# EAGLE board STM32F050F Base_Routed (EAGLE 6.5.0)
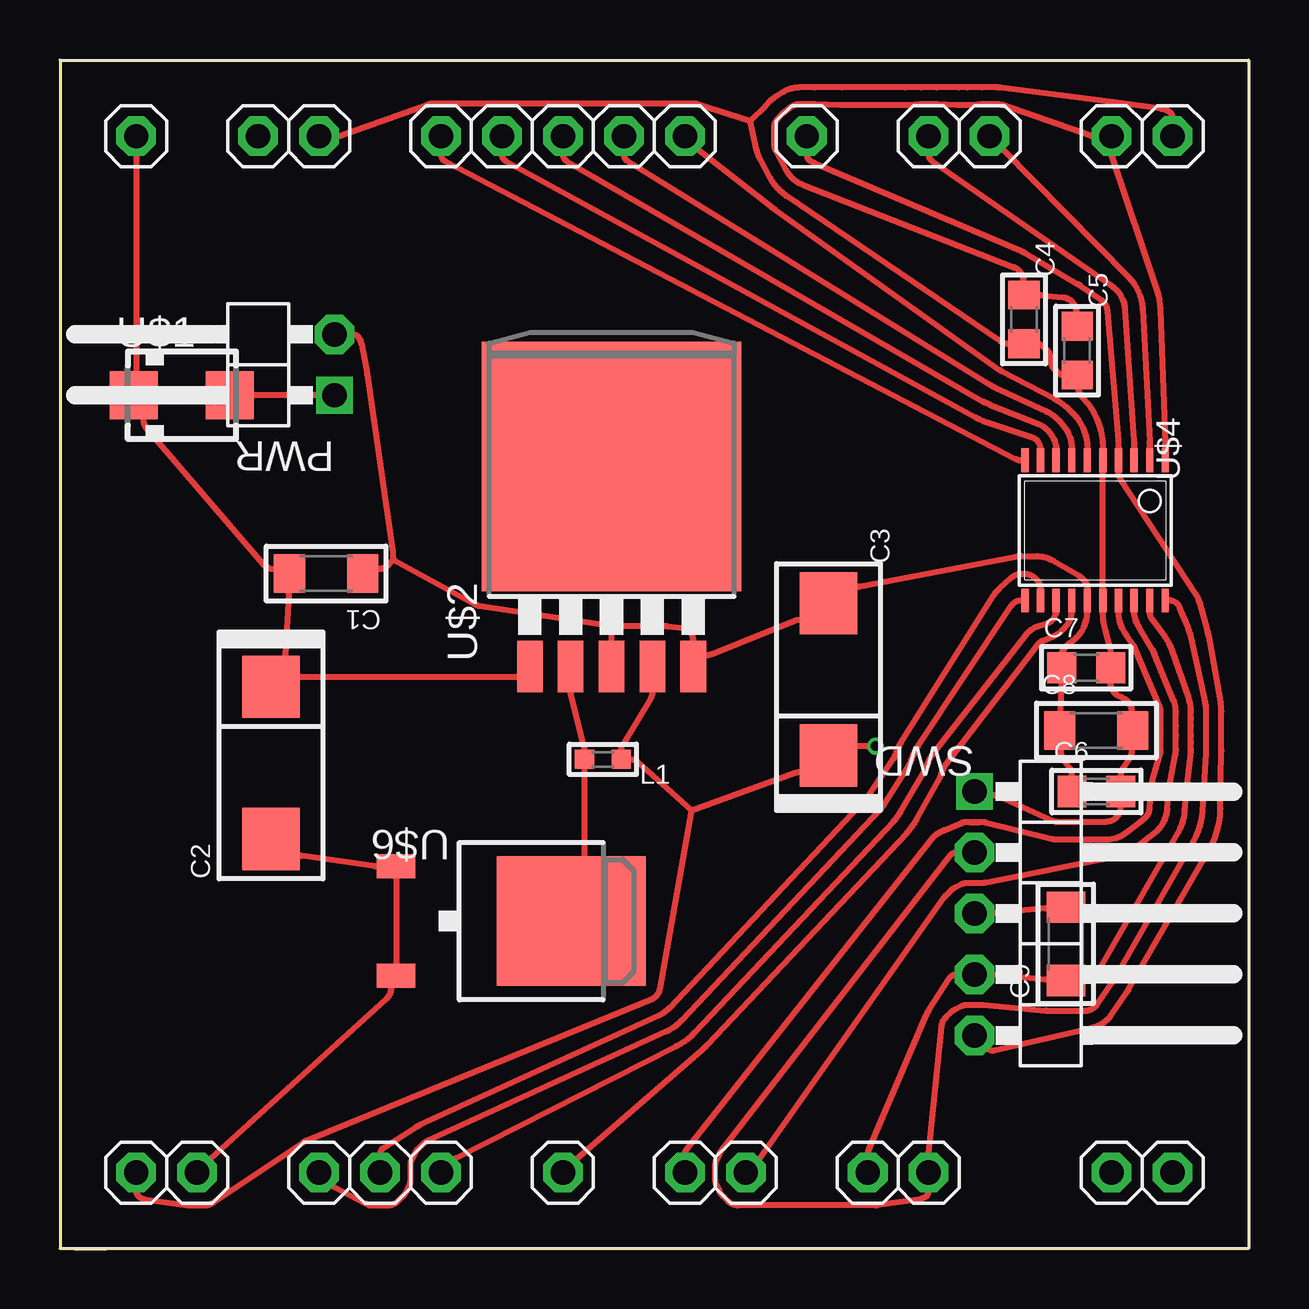
[diagram p0: board, top side]
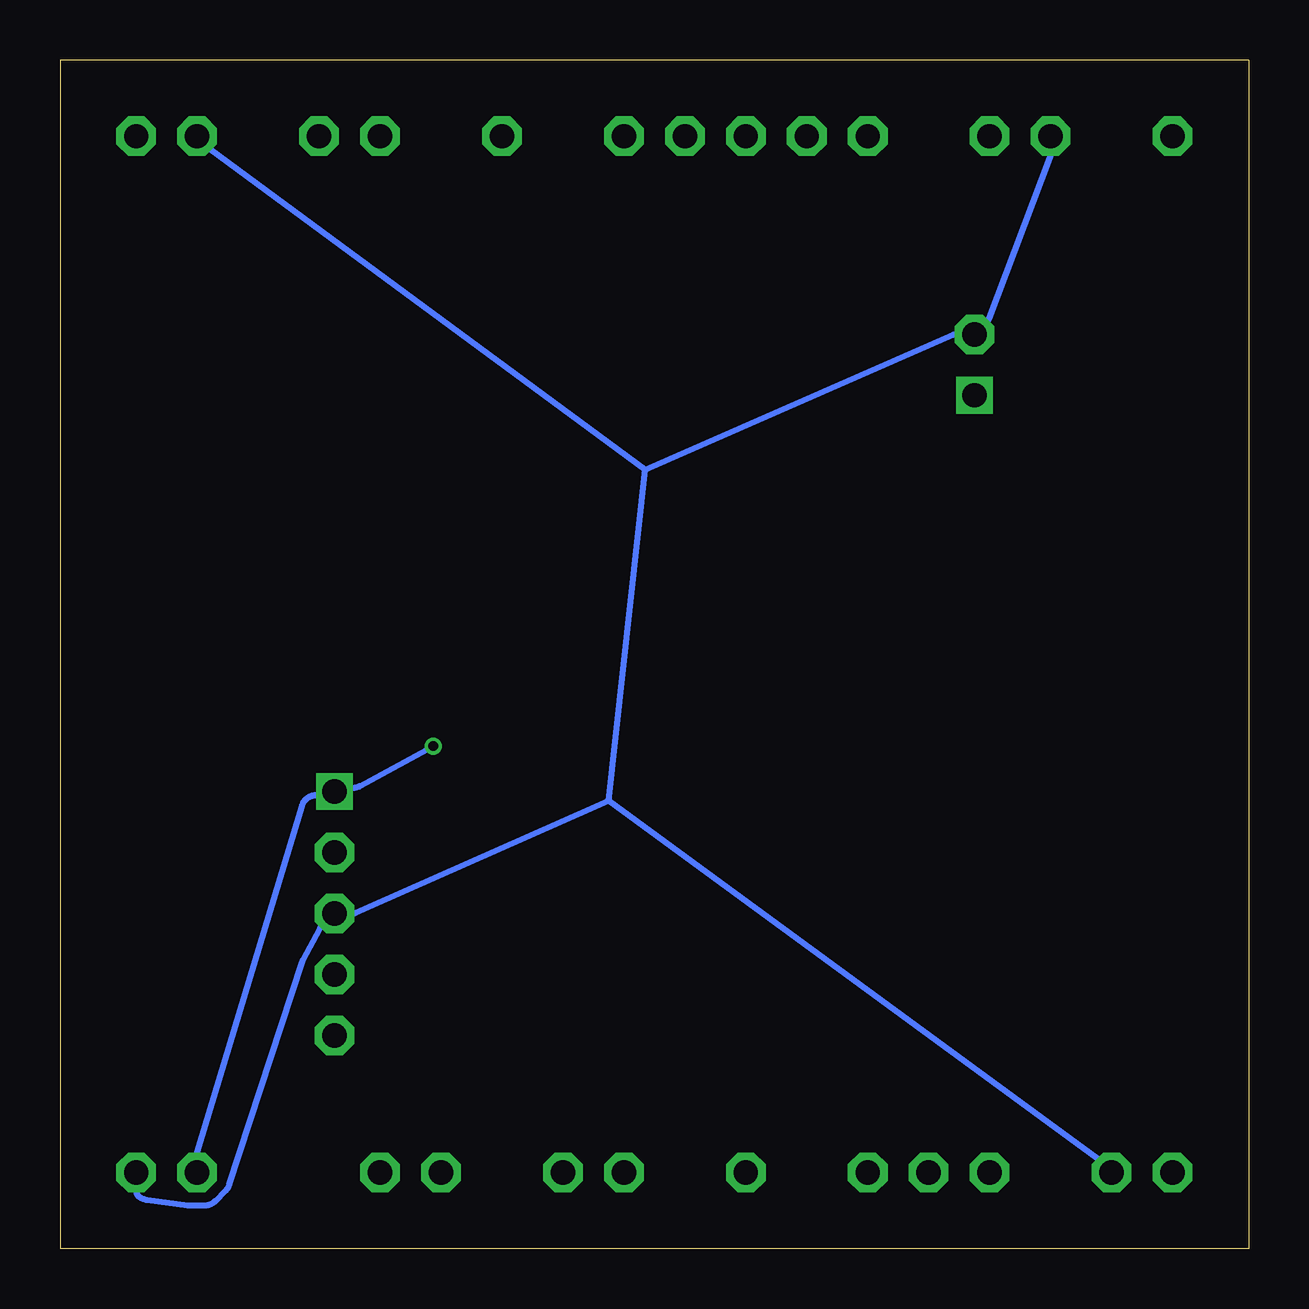
[diagram p1: board, bottom side, seen from below]

Size 49.53 x 49.53 mm. Coordinates in mm from the lower left corner, seen from the top.
Outline: 0,49.52 0,0 49.53,0 49.53,49.52
Outline: 0,49.53 49.53,49.53
Copper layers (1*16): Top 0.035mm / dielectric 1.5mm / Bottom 0.035mm
Design rules "ITEADstudio_DRC": minimum track width 6mil, minimum drill 12mil, track to track 6mil, track to pad 6mil, pad to pad 6mil, via to via 6mil, smd to smd 0mil, copper to edge 10mil, drill to drill 10mil, minimum pad ring 10mil, minimum via ring 6mil, stop-mask expansion 2mil, vias tented up to drill 100mil, thermal gap 10mil
Net classes: 0 default: width 0.254 mm, clearance 0.305 mm

## Footprints (pad centres in the part's own frame; a part is rotated, then mirrored left to right if it is on the bottom)
RC-MASTER-SMD$ = smd 1.3 x 1.6: 1 -1.524,0; 2 1.524,0
RC-MASTER-SMD$' = smd 2.6 x 2.4: + 3.175,0; - -3.175,0
RC-MASTER-SMD$'' = smd 1.2 x 1.3: 1 -1.016,0; 2 1.016,0
RC-MASTER-SMD$''' = smd 0.8 x 0.8: 1 -0.762,0; 2 0.762,0
PINHEAD-2$ = drill 1.016 pad 1.524 square: 1 -2.54,-3.81 | drill 1.016 pad 1.649 octagon: 2 0,-3.81
PINHEAD-2$' = drill 1.016 pad 1.524 square: 1 -5.08,-3.81 | drill 1.016 pad 1.649 octagon: 2 -2.54,-3.81; 3 0,-3.81; 4 2.54,-3.81; 5 5.08,-3.81
MY-LIBRARY$ = smd 2 x 2: A 2,0; C -2,0
MY-LIBRARY$' = smd 1.067 x 2.159: 1 -3.404,-5.791; 2 -1.702,-5.791; 3 0,-5.791; 4 1.702,-5.791; 5 3.404,-5.791 | smd 10.8 x 10.41: 6 0,2.54
MY-LIBRARY$'' = drill 1.016 pad 1.649 octagon: +12V 3.175,46.355; GND1 8.255,46.355; GND2 43.815,46.355; GND3 46.355,3.175; GND4 5.715,3.175; NRST 31.115,46.355; PA0 26.035,46.355; PA1 23.495,46.355; PA2 20.955,46.355; PA3 18.415,46.355; PA4 15.875,46.355; PA5 10.795,3.175; PA6 13.335,3.175; PA7 15.875,3.175; PA9 26.035,3.175; PA10 28.575,3.175; PA13 33.655,3.175; PA14 36.195,3.175; PB1 20.955,3.175; PF0 38.735,46.355; PF1 36.195,46.355; VDD1 10.795,46.355; VDD2 46.355,46.355; VDD3 43.815,3.175; VDD4 3.175,3.175
STM32F0$ = smd 0.305 x 0.991: 1 -2.925,-2.918; 2 -2.275,-2.918; 3 -1.625,-2.918; 4 -0.975,-2.918; 5 -0.325,-2.918; 6 0.325,-2.918; 7 0.975,-2.918; 8 1.625,-2.918; 9 2.275,-2.918; 10 2.925,-2.918; 11 2.925,2.918; 12 2.275,2.918; 13 1.625,2.918; 14 0.975,2.918; 15 0.325,2.918; 16 -0.325,2.918; 17 -0.975,2.918; 18 -1.625,2.918; 19 -2.275,2.918; 20 -2.925,2.918
MY-LIBRARY$''' = smd 1 x 1.6: 1 -2.28,-6.07; 2 2.28,-6.07 | smd 5.4 x 6.2: 3 0,1.23

## Placement (x,y rotation side)
C1  4.7uF  [RC-MASTER-SMD$]  11.09,28.13 180 top
C2  100uF 20V  [RC-MASTER-SMD$']  8.79,20.24 90 top
C3  330uF 6.3V  [RC-MASTER-SMD$']  32.02,23.72 270 top
C4  0.01uf  [RC-MASTER-SMD$'']  40.17,38.72 270 top
C5  1uf  [RC-MASTER-SMD$'']  42.38,37.42 270 top
C6  0.1uF  [RC-MASTER-SMD$'']  43.18,19.05 0 top
C7  0.1uF  [RC-MASTER-SMD$'']  42.76,24.21 0 top
C8  4.7uF  [RC-MASTER-SMD$]  43.18,21.59 0 top
C9  [RC-MASTER-SMD$]  41.91,12.7 90 top
L1  L_0603  [RC-MASTER-SMD$''']  22.62,20.39 180 top
PWR  [PINHEAD-2$]  7.62,38.1 90 top
SWD  [PINHEAD-2$']  41.91,13.97 270 top
U$1  10MQ040  [MY-LIBRARY$]  5.08,35.56 0 top
U$2  LM2596S  [MY-LIBRARY$']  22.98,30.05 0 top
U$3  [MY-LIBRARY$'']  0,0 0 top
U$4  STM32F050F4P6  [STM32F0$]  43.13,29.93 180 top
U$6  30WQ03  [MY-LIBRARY$''']  20.07,13.65 270 top

## Library data of the parts
C1 C8 C9 = $C1206
C2 C3 = $C7343/T
C4-C7 = $C0805
L1 = $L0603
PWR = $1X02/90-S
SWD = $1X05/90-S
U$1 = $SMA
U$2 = $TO263-5
U$3 = $STM32_BASE_MINI
U$4 = $TSSOP20
U$6 = $TO252

## Nets
+3V3: C3.+ C4.2 C5.2 C6.2 C7.2 C8.2 L1.1 SWD.1 U$2.4 U$3.VDD1 U$3.VDD2 U$3.VDD3 U$3.VDD4 U$4.5 U$4.16
+12V: C1.2 C2.+ U$1.C U$2.1 U$3.+12V
GND: C1.1 C2.- C3.- C4.1 C5.1 C6.1 C7.1 C8.1 C9.2 PWR.2 SWD.3 U$2.3 U$2.5 U$3.GND1 U$3.GND2 U$3.GND3 U$3.GND4 U$4.1 U$4.15 U$6.1 U$6.2
N$23: PWR.1 U$1.A
N$34: L1.2 U$2.2 U$6.3
NRST: SWD.5 U$3.NRST U$4.4
PA0: U$3.PA0 U$4.6
PA1: U$3.PA1 U$4.7
PA2: U$3.PA2 U$4.8
PA3: U$3.PA3 U$4.9
PA4: U$3.PA4 U$4.10
PA5: U$3.PA5 U$4.11
PA6: U$3.PA6 U$4.12
PA7: U$3.PA7 U$4.13
PA9: U$3.PA9 U$4.17
PA10: U$3.PA10 U$4.18
PA13: C9.1 SWD.4 U$3.PA13 U$4.19
PA14: SWD.2 U$3.PA14 U$4.20
PB1: U$3.PB1 U$4.14
PF0: U$3.PF0 U$4.2
PF1: U$3.PF1 U$4.3

## Tracks (layer width: path | path; a pad name or v marks a point on that pad's centre or on a via)
+3V3  (via drill 0.4 pad 0.7)
  Top 0.254: v33.98,20.94 33.22,20.94 33.09,20.94 C3.+ 30.95,19.86 30.82,19.86 arc20 30.61,19.82 26.33,18.24 | U$3.VDD2 46.35,46.99 46.35,47.12 arc66 46.17,47.41 46.06,47.45 arc16 45.9,47.5 44.21,47.72 39.22,48.38 arc7 39.05,48.39 38.42,48.39 | 38.42,48.39 | 38.42,48.39 37.8,48.39 | 37.8,48.39 | 37.8,48.39 37.47,48.39 | 37.47,48.39 | 37.47,48.39 36.51,48.39 | 36.51,48.39 | 36.51,48.39 35.88,48.39 | 35.88,48.39 | 35.88,48.39 35.2,48.39 | 35.2,48.39 | 35.2,48.39 32.57,48.39 | 32.57,48.39 | 32.57,48.39 31.43,48.39 | 31.43,48.39 | 31.43,48.39 30.8,48.39 arc31 30.15,48.21 29.89,48.05 arc14 29.62,47.85 29.4,47.62 28.77,46.99 | U$3.VDD1 11.43,46.35 11.56,46.35 arc20 11.66,46.37 15.35,47.69 arc-20 15.56,47.73 26.35,47.73 arc-18 26.54,47.7 28.77,46.99 | U$3.VDD4 3.17,2.54 3.17,2.41 arc66 3.36,2.12 3.47,2.08 arc16 3.63,2.03 5.32,1.81 arc8 5.4,1.8 6.03,1.8 arc34 6.37,1.91 10.14,4.44 arc-12 10.25,4.5 24.63,10.39 arc58 25,10.84 26.33,18.24 | 26.33,18.24 24.05,20.29 arc42 23.78,20.39 23.66,20.39 L1.1 23.38,20.66 23.38,20.79 arc-31 23.44,21 24.6,22.9 arc31 24.68,23.18 24.68,23.31 U$2.4 | SWD.1 38.73,18.9 38.86,18.9 arc-24 39.11,18.84 41.31,17.84 arc24 41.56,17.79 42.76,17.79 42.77,17.79 43.6,17.8 arc89 44.2,18.4 44.2,18.53 C6.2 44.2,19.57 44.2,19.7 arc-32 44.29,20.02 44.57,20.46 arc32 44.66,20.79 44.66,20.92 C8.2 44.66,22.26 44.66,22.39 44.66,22.45 arc63 44.28,22.95 44.16,23 arc-69 43.78,23.56 43.78,23.69 C7.2 43.78,24.73 43.78,24.86 arc15 43.76,25.01 43.55,25.82 arc-15 43.45,26.52 43.45,26.64 U$4.16 43.45,27.38 43.45,27.51 43.45,32.35 43.45,32.48 U$4.5 43.45,33.22 43.45,33.34 arc42 42.64,35.43 42.63,35.44 arc-14 42.56,35.55 42.42,35.8 42.42,35.93 C5.2 41.86,36.4 41.73,36.4 41.43,36.66 arc-56 41.27,37.05
  Top 0.254: 41.27,37.05 arc56 41.12,37.45 40.82,37.7 40.69,37.7 C4.2 39.65,37.7 39.52,37.7 arc-34 39.18,37.81 30.26,43.87 arc-27 29.6,44.6 29.17,45.4 arc-16 29.04,45.76 28.77,46.99 | 41.27,37.05
  Bottom 0.254: U$3.VDD3 43.81,3.81 43.81,3.94 arc17 43.8,4.03 39.45,18.46 arc73 38.86,18.9 38.73,18.9 SWD.1 37.47,19.2 37.34,19.2 arc-28 37.05,19.28 v33.98,20.94
+12V
  Top 0.254: U$3.+12V 3.17,45.72 3.17,45.59 3.17,36.56 3.17,36.43 U$1.C 3.47,34.69 3.47,34.56 arc41 3.62,34.16 8.45,28.53 arc49 8.92,28.32 9.04,28.32 C1.2 9.53,27.46 9.53,27.33 arc-3 9.53,27.3 9.38,24.75 arc3 9.38,24.71 9.38,24.59 C2.+ 9.86,23.84 9.99,23.84 19.04,23.84 19.17,23.84 U$2.1
GND
  Top 0.254: 13.88,28.7 13.71,28.52 arc-48 13.26,28.32 13.14,28.32 C1.1 | 13.88,28.7 17.29,26.85 arc20 17.49,26.78 22.99,25.95 | 22.99,25.95 25.22,25.95 arc-7 25.29,25.94 25.91,25.87 arc-83 26.38,25.34 26.38,25.21 U$2.5 26.79,24.73 26.92,24.73 arc22 27.14,24.77 30.59,26.16 arc-22 30.82,26.2 30.95,26.2 C3.- 33.09,27.59 33.22,27.59 arc11 33.33,27.6 39.8,28.83 arc-11 40.05,28.85 40.7,28.85 arc-30 41.38,28.67 42.46,28.03 arc-17 42.6,27.92 42.67,27.84 arc-43 42.8,27.51 42.8,27.38 U$4.15 42.8,26.64 42.8,26.52 arc-53 42.22,25.35 42.06,25.24 arc15 41.98,25.15 41.74,24.86 41.74,24.73 C7.1 41.74,23.69 41.74,23.56 arc-2 41.74,23.54 41.7,22.41 arc2 41.7,22.39 41.7,22.26 C8.1 41.7,20.92 41.7,20.79 arc32 41.79,20.46 42.07,20.02 arc-32 42.16,19.7 42.16,19.57 C6.1 | U$4.1 46.05,33.22 46.05,33.34 arc2 46.05,33.54 45.85,39.14 arc17 45.7,39.94 43.83,45.49 arc-19 43.81,45.59 43.81,45.72 U$3.GND2 43.18,46.35 43.05,46.35 arc-19 42.95,46.37 39.24,47.66 arc20 39.04,47.69 38.93,47.69 arc-2 38.86,47.69 38.75,47.69 arc2 38.72,47.69 38.61,47.69 arc-2 38.54,47.69 38.43,47.69 arc5 38.38,47.69 37.94,47.65 arc-4 37.8,47.65 37.47,47.65 arc-2 37.38,47.65 36.53,47.69 arc4 36.5,47.69 36.39,47.69 arc-2 36.32,47.69 36.21,47.69 arc2 36.18,47.69 36.07,47.69 arc-2 36,47.69 35.89,47.69 arc5 35.84,47.69 35.32,47.65 arc-4 35.2,47.65 32.57,47.65 arc-2 32.51,47.65 31.45,47.69 arc3 31.42,47.69 31.3,47.69 arc-2 31.24,47.69 31.13,47.69 arc2 31.1,47.69 30.99,47.69 arc-2 30.92,47.69 30.81,47.69 arc39 30.45,47.57 30.2,47.37 arc7 30.14,47.33 29.92,47.1 arc45 29.74,46.67 29.74,46.04 arc28 29.82,45.75 30.25,44.95 arc40 30.94,44.34 39.74,40.9 arc-69 40.13,40.34 40.13,40.21 C4.1 40.69,39.74 40.82,39.74 arc-6 40.88,39.73 41.79,39.64 arc-84 42.34,39.04 42.34,38.91 C5.1
  Top 0.254: U$3.GND4 6.16,3.62 6.25,3.71 | 6.25,3.71 | 6.25,3.71 arc-3 6.26,3.72 13.61,10.42 arc48 13.81,10.87 13.81,11 U$6.2 14,11.74 14,11.87 14,15.43 14,15.56 U$6.1 13.33,15.93 13.2,15.93 arc-8 13.13,15.94 10.08,16.37 arc8 9.99,16.38 9.86,16.38 C2.- | C9.2 41.24,14.18 41.11,14.18 arc6 41.05,14.18 38.89,13.97 arc-6 38.86,13.97 38.73,13.97 SWD.3 | PWR.2 12.06,38.1 12.19,38.1 arc-66 12.48,37.91 12.53,37.81 arc-13 12.57,37.67 12.79,36.43 arc-2 12.79,36.41 13.87,29.02 arc-7 13.87,28.95 13.88,28.7 | U$2.3 22.98,25.21 22.98,25.34 22.98,25.35 22.99,25.95
  Bottom 0.254: 25.14,32.45 43.24,45.78 arc9 43.28,45.82 | 43.28,45.82 | 43.28,45.82 43.37,45.91 U$3.GND2 | U$3.GND3 46.35,2.54 46.35,2.41 arc-66 46.17,2.12 46.06,2.08 arc-16 45.9,2.03 44.21,1.81 arc-8 44.13,1.8 43.5,1.8 arc-45 43.07,1.98 42.62,2.43 arc-27 42.47,2.67 39.44,11.94 arc10 39.4,12.03 38.69,13.36 arc17 38.64,13.43 | 38.64,13.43 | 38.64,13.43 38.55,13.52 SWD.3 37.47,13.97 37.34,13.97 arc-24 37.21,14 26.66,18.66 | U$3.GND4 6.16,3.62 6.25,3.71 | 6.25,3.71 | 6.25,3.71 arc-9 6.29,3.75 26.66,18.66 | 10.89,38.64 10.98,38.55 PWR.2 12.06,38.1 12.19,38.1 arc-24 12.32,38.07 25.14,32.45 | 10.89,38.64 | 10.89,38.64 arc-24 10.82,38.75 8.28,45.48 arc-21 8.26,45.59 8.26,45.72 U$3.GND1 | 26.66,18.66 25.14,32.45
N$23
  Top 0.254: PWR.1 10.79,35.56 10.67,35.56 8.08,35.56 7.95,35.56 U$1.A
N$34
  Top 0.254: U$6.3 21.86,16.22 21.86,16.35 21.86,19.99 21.86,20.12 L1.2 21.86,20.66 21.86,20.79 arc14 21.85,20.89 21.3,23.05 arc-14 21.28,23.18 21.28,23.31 U$2.2
NRST
  Top 0.254: U$3.NRST 31.11,45.72 31.11,45.59 arc66 31.3,45.3 31.41,45.26 40.05,41.57 arc-7 40.2,41.5 42.41,40.2 arc-4 42.49,40.15 43.38,39.54 arc-51 43.64,39.09 44.09,33.68 arc-5 44.1,33.34 44.1,33.22 U$4.4 44.1,32.48 44.1,32.35 arc33 44.19,32.08 47.34,27.25 arc-17 47.5,26.88 47.8,25.82 arc-5 47.88,25.49 48.34,22.93 arc-10 48.39,22.39 48.39,20.79 arc-1 48.39,20.75 48.35,18.35 arc-29 47.88,16.62 44.52,10.79 arc-5 44.43,10.65 43.82,9.76 arc-42 43.01,9.21 38.93,8.27 arc-58 38.64,8.35 | SWD.5 38.55,8.44 38.64,8.35 | 38.64,8.35
PA0
  Top 0.254: U$3.PA0 26.48,45.91 26.57,45.82 | 26.57,45.82 | 26.57,45.82 arc7 26.6,45.79 29.69,43.37 arc3 29.79,43.3 39.17,36.61 arc8 39.24,36.56 41.44,35.41 arc-14 41.9,35.09 42.09,34.92 arc-49 42.8,33.34 42.8,33.22 U$4.6
PA1
  Top 0.254: U$3.PA1 23.5,45.72 23.5,45.59 arc58 23.64,45.33 38.81,35.96 arc7 38.95,35.88 41.08,34.9 arc-25 41.67,34.45 41.81,34.28 arc-40 42.16,33.34 42.16,33.22 U$4.7
PA2
  Top 0.254: U$3.PA2 20.95,45.72 20.95,45.59 arc60 21.11,45.32 38.48,35.3 arc8 38.75,35.17 40.77,34.37 arc-38 41.31,33.89 41.4,33.74 arc-30 41.51,33.34 41.51,33.22 U$4.8
PA3
  Top 0.254: U$3.PA3 18.41,45.72 18.41,45.59 arc61 18.58,45.32 38.17,34.63 arc10 38.63,34.43 40.51,33.81 arc-58 40.83,33.46 40.85,33.38 arc-14 40.85,33.34 40.85,33.22 U$4.9
PA4
  Top 0.254: U$3.PA4 15.88,45.72 15.88,45.59 arc62 16.05,45.31 39.82,32.9 arc28 40.05,32.85 40.18,32.85 U$4.10
PA5
  Top 0.254: U$3.PA5 11.24,2.73 11.33,2.64 | 11.33,2.64 | 11.33,2.64 arc17 11.41,2.58 12.73,1.88 arc28 13.02,1.8 13.65,1.8 arc45 14.08,1.98 14.3,2.21 arc19 14.42,2.37 14.55,2.63 arc26 14.61,2.86 14.61,3.49 arc-26 14.66,3.71 14.79,3.98 arc-19 14.9,4.14 15.13,4.37 arc-20 15.3,4.49 25.27,9.06 arc22 25.92,9.52 34.2,18.32 arc11 34.36,18.53 35.34,20.09 arc13 35.5,20.43 arc-15 35.72,20.89 39.64,26.79 arc-56 40.05,27.01 40.18,27.01 U$4.11
PA6
  Top 0.254: U$3.PA6 13.34,3.81 13.34,3.94 arc-57 13.48,4.2 14.83,5.07 arc-8 15,5.16 24.96,9.73 arc22 25.38,10.03 33.66,18.83 arc10 33.73,18.91 34.74,20.44 arc15 34.84,20.65 arc-14 35.11,21.22 38.91,27.24 arc-16 39.15,27.52 39.65,27.96 arc-42 40.05,28.12 40.2,28.12 arc-47 40.65,27.92 40.72,27.84 arc-43 40.85,27.51 40.85,27.38 U$4.12
PA7
  Top 0.254: U$3.PA7 16.32,3.62 16.41,3.71 | 16.41,3.71 | 16.41,3.71 arc-18 16.49,3.77 25.68,8.44 arc20 26.45,9.02 34.74,17.82 arc13 35.01,18.18 35.95,19.77 arc12 36.15,20.21 36.15,20.21 arc-19 36.35,20.58 40.24,25.57 arc-34 40.79,25.96 41.15,26.07 arc49 41.44,26.33 41.49,26.46 arc24 41.51,26.52 41.51,26.64 U$4.13
PA9
  Top 0.254: U$3.PA9 26.04,3.81 26.04,3.94 arc-38 26.1,4.13 36.28,17.03 arc-30 36.83,17.44 37.59,17.75 arc-29 37.85,17.78 37.89,17.78 arc9 37.97,17.77 38.08,17.78 arc-5 38.12,17.78 38.23,17.77 arc9 38.31,17.78 38.35,17.78 arc-21 38.54,17.77 41.24,17.09 arc14 41.56,17.05 43.6,17.05 arc38 44.42,17.34 45.17,17.92 arc48 45.4,18.36 45.45,19 arc-12 45.61,19.86 45.84,20.65 arc19 45.86,20.81 45.85,20.95 arc-5 45.85,21.24 45.86,21.38 arc2 45.86,21.4 45.86,21.78 arc2 45.86,21.8 45.85,21.94 arc-5 45.85,22.23 45.86,22.37 arc25 45.82,22.59 44.79,25.03 arc12 44.74,25.11 44.46,25.52 arc-5 44.37,25.66 44.29,25.8 arc-29 44.1,26.52 44.1,26.64 U$4.17
PA10
  Top 0.254: U$3.PA10 29.02,3.62 29.11,3.71 | 29.11,3.71 | 29.11,3.71 arc10 29.15,3.75 36.84,14.64 arc-10 36.91,14.72 37.13,14.94 arc-19 37.29,15.06 37.56,15.19 arc-26 37.78,15.24 38.42,15.24 arc11 38.52,15.25 44.01,16.36 arc26 44.87,16.76 45.62,17.34 arc48 46.14,18.3 46.19,18.95 arc-7 46.23,19.33 46.47,20.58 arc12 46.49,20.82 46.48,21.01 arc-3 46.48,21.18 46.49,21.37 arc2 46.49,21.4 46.49,21.78 arc2 46.49,21.81 46.48,22 arc-3 46.48,22.17 46.49,22.36 arc24 46.41,22.82 45.62,24.75 arc9 45.53,24.94 44.95,25.92 arc0 44.94,25.93 | 44.94,25.93 | 44.94,25.93 arc-11 44.84,26.13 44.8,26.24 arc-20 44.76,26.52 44.76,26.64 U$4.18
PA13
  Top 0.254: U$3.PA13 33.66,3.81 33.66,3.94 arc-23 33.68,4.06 36.1,9.73 arc-10 36.2,9.93 37.07,11.29 arc-57 37.34,11.43 37.47,11.43 SWD.4 38.73,11.43 38.86,11.43 arc-6 38.89,11.43 41.05,11.22 arc6 41.11,11.22 41.24,11.22 C9.1 42.58,11.22 42.71,11.22 arc60 43.24,11.52 46.6,17.36 arc26 46.87,18.25 46.92,18.89 arc-2 46.93,19 47.11,20.59 arc7 47.12,20.82 47.12,21.05 arc-2 47.12,21.14 47.12,21.37 arc1 47.12,21.4 47.12,21.78 arc1 47.12,21.81 47.12,22.05 arc-2 47.12,22.12 47.12,22.36 arc20 47.02,22.97 46.34,24.93 arc18 46.04,25.5 45.5,26.22 arc-37 45.41,26.52 45.41,26.64 U$4.19
PA14
  Top 0.254: U$4.20 46.08,27.01 46.21,27.01 arc-68 46.66,26.7 46.98,25.93 arc-10 47.13,25.47 47.7,22.91 arc-13 47.75,22.37 47.75,22.1 arc1 47.75,22.07 47.75,21.8 arc0 47.75,21.78 47.75,21.4 arc0 47.75,21.38 47.75,21.11 arc1 47.75,21.08 47.75,20.81 arc-4 47.75,20.65 47.61,18.24 arc-27 47.24,16.99 43.88,11.15 arc-5 43.82,11.06 43.21,10.18 arc-55 42.71,9.92 41.11,9.92 arc-5 41.05,9.92 38.46,10.16 arc5 38.42,10.16 37.78,10.16 arc26 37.56,10.11 37.29,9.98 arc19 37.13,9.86 36.91,9.64 arc39 36.73,9.27 36.2,3.97 arc6 36.2,3.94 36.2,3.81 U$3.PA14 36.2,2.54 36.2,2.41 arc-66 36.01,2.12 35.9,2.08 arc-16 35.74,2.03 34.05,1.81 arc-8 33.97,1.8 28.26,1.8 arc-45 27.83,1.98 27.61,2.21 arc-19 27.49,2.37 27.36,2.63 arc-26 27.3,2.86 27.3,3.49 arc-26 27.36,3.71 27.49,3.98 arc-12 27.55,4.09 37.09,16.39 arc-52 37.34,16.51 37.47,16.51 SWD.2
PB1
  Top 0.254: U$3.PB1 21.4,3.62 21.49,3.71 | 21.49,3.71 | 21.49,3.71 arc-4 21.51,3.73 26.73,8.27 arc6 26.99,8.51 35.27,17.31 arc14 35.68,17.87 36.58,19.49 arc11 36.8,19.99 | 36.8,19.99 | 36.8,19.99 arc-19 36.89,20.15 40.74,25.17 arc-29 40.94,25.33 41.43,25.54 arc26 41.81,25.82 41.96,25.99 arc41 42.16,26.52 42.16,26.64 U$4.14
PF0
  Top 0.254: U$3.PF0 39.18,45.91 39.27,45.82 | 39.27,45.82 | 39.27,45.82 39.28,45.81 44.51,40.5 arc-42 45.11,39.14 45.4,33.62 arc-3 45.41,33.34 45.41,33.22 U$4.2
PF1
  Top 0.254: U$3.PF1 36.2,45.72 36.2,45.59 arc55 36.33,45.33 43.8,40.14 arc-51 44.37,39.13 44.74,33.66 arc-4 44.76,33.34 44.76,33.22 U$4.3